# Altium PCB LED Indicator.PcbDoc
Units mil, origin at the board's own origin, x right, y up, seen from the top; angles counter-clockwise.
Board outline 2150 x 1085 mil, 2 copper layers (Top Layer, Bottom Layer); 26 components, 20 nets, 114 pads, 43 vias.
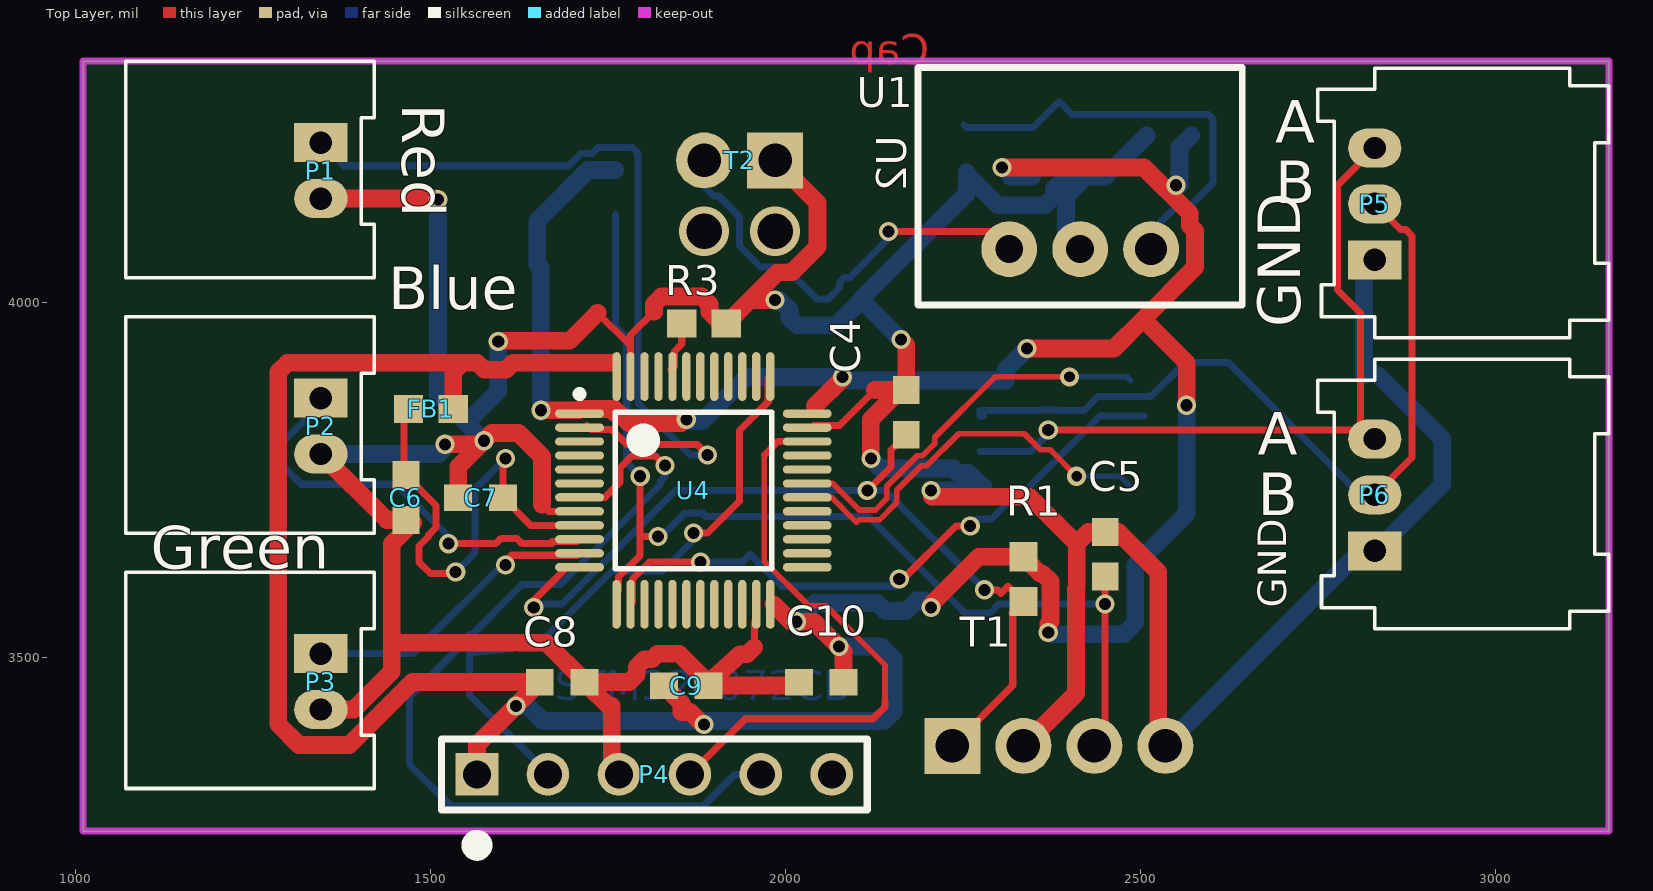
[diagram p0: Top Layer view]
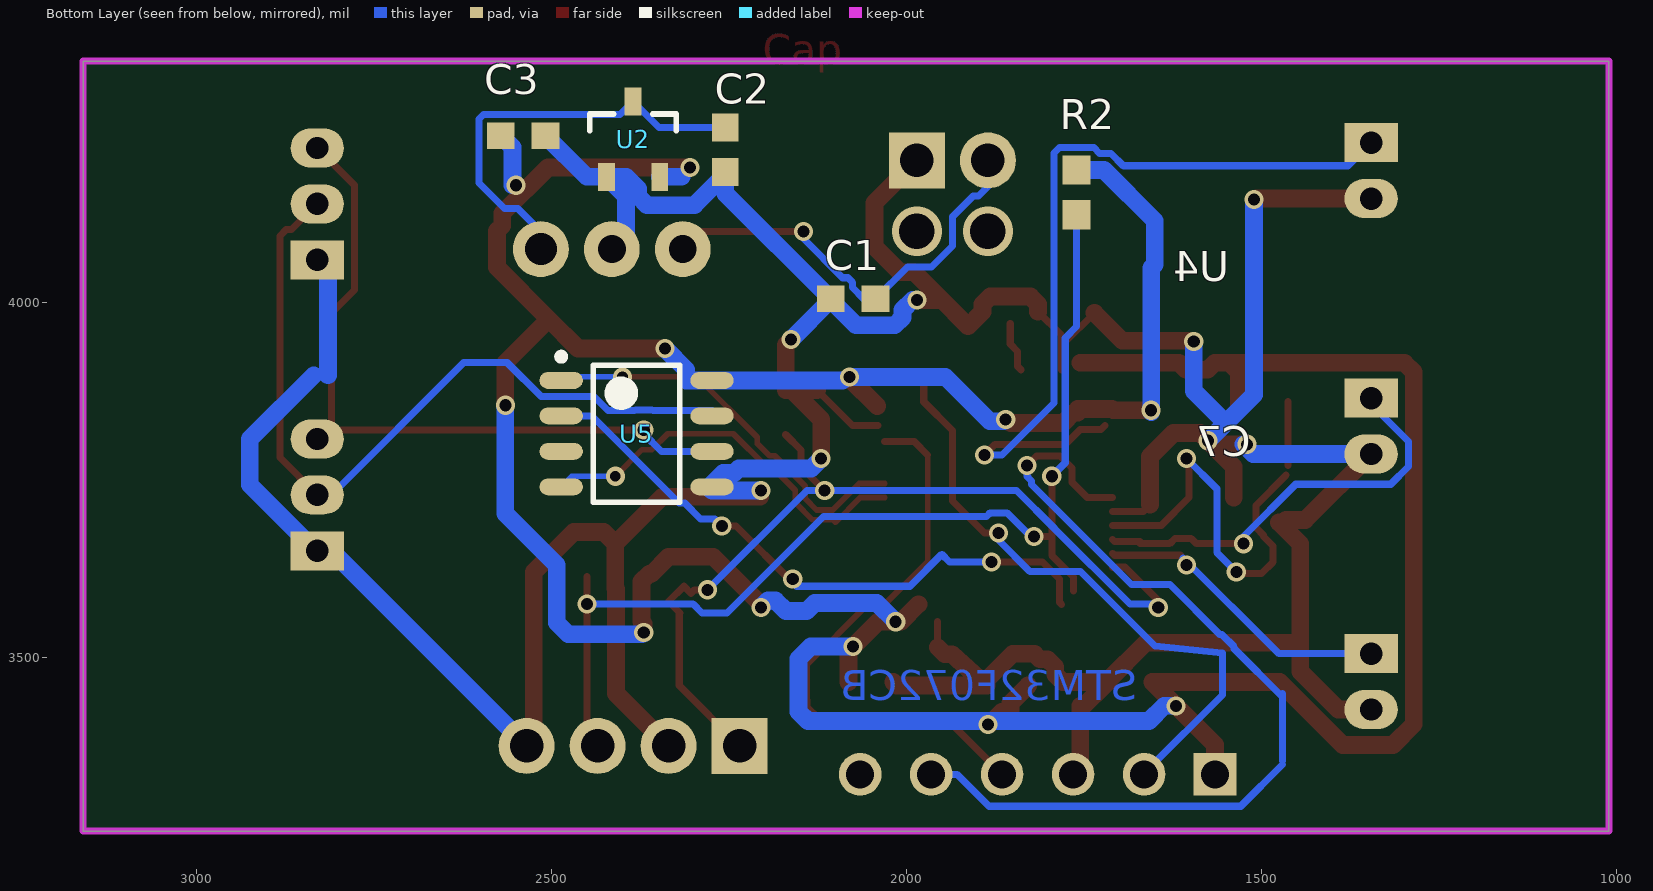
[diagram p1: Bottom Layer view, seen from below]

## Layer stack, top to bottom
Top Solder: solder mask 0.4, Solder Resist, Dk 3.5
Top Layer: signal copper 1.4
Dielectric1: dielectric 12.6, FR-4, Dk 4.8
Bottom Layer: signal copper 1.4
Bottom Solder: solder mask 0.4, Solder Resist, Dk 3.5

## Board outline
1010,3255 1010,4340 3160,4340 3160,3255

## Design rules (kind name [scope] priority, off if disabled: settings)
Clearance [All] p1: gap=10 except(6: Track-Track Track-SMDPad SMDPad-SMDPad)
PolygonConnect [All] p1: connectstyle=Relief reliefconductorwidth=10 reliefentries=4 polygonreliefangle="90 Angle" airgapwidth=10
RoutingVias [All] p1: holewidth=28 width=50 viastyle="Through Hole" minholewidth=28 minwidth=50 maxholewidth=28 maxwidth=50
SolderMaskExpansion [All] p1: expansion=4
Width [All] p1: maxlimit=25 minlimit=8 preferedwidth=10 minimp=50.000000 maximp=50.000000 favimp=50.000000
30 further rules are at their usual default settings.

## Components (designator, comment, footprint, x,y, rotation, side; value= is the part's Value field where it differs from the comment)
C1 "Cap" CAPC0603 2075,4005 r0 bottom
C2 "Cap" CAPC0603 2255,4215 r270 bottom
C3 "Cap" CAPC0603 2540,4235 r180 bottom
C4 "Cap" CAPC0603 2170,3845 r90 top
C5 "Cap" CAPC0603 2450,3645 r90 top
C6 "Cap" CAPC0603 1465,3725 r270 top
C7 "Cap" CAPC0603 1570,3725 r180 top
C8 "Cap" CAPC0603 1685,3465 r0 top
C9 "Cap" CAPC0603 1860,3460 r0 top
C10 "Cap" CAPC0603 2050,3465 r180 top
FB1 "FBead" RES0603 1500,3850 r0 top
P1 "2-pin Horz Sherlock" MOLEX-HDR-1X2-SHERLOCK-HORZ 1345,4225 r90 top
P2 "2-pin Horz Sherlock" MOLEX-HDR-1X2-SHERLOCK-HORZ 1345,3865 r90 top
P3 "2-pin Horz Sherlock" MOLEX-HDR-1X2-SHERLOCK-HORZ 1345,3505 r90 top
P4 "SWD" SWD_STM32 1565,3335 r90 top
P5 "RS485" MOLEX-HDR-1X3-SHERLOCK-RA 2830,4060 r270 top
P6 "RS485_I" MOLEX-HDR-1X3-SHERLOCK-RA 2830,3650 r270 top
R1 "Res" RES0603 2335,3610 r270 top
R2 "Res" RES0603 1760,4155 r270 bottom
R3 "Res" RES0603 1885,3970 r0 top
T1 "1725672" 1725672 2235,3375 r90 top
T2 "1725656" 1725656 1985,4200 r270 top
U1 "R-78C5.0-1.0" R-78C5.0-1.0 2315,4075 r0 top
U2 "MCP1703AT" MCP1703AT-xx02EDB 2385,4230 r90 bottom
U4 "STM32F072CB" STM32F072CB 1870,3735 r0 top
U5 "SP3485" SP3485 2380,3815 r180 bottom

## Footprints (in the part's own frame and the unit in brackets; to place one, negate y for a bottom-side part, rotate by r counter-clockwise, add the part's x,y. Pads: shape width x height; smd on the part's side, far side on the other; paste and mask are expansions set on the pad)
1725656 [mm] "CONN TERM BLOCK 2.54MM 2POS"
  rect 2x2 hole 1.2: 1(0,0)
  round 2 hole 1.2: 2(0,-2.54)
1725672 [mm] "CONN TERM BLOCK 2.54MM 2POS"
  rect 2x2 hole 1.2: 1(0,0)
  round 2 hole 1.2: 2(0,-2.54) 3(0,-5.08) 4(0,-7.62)
CAPC0603 [mm] "Chip Capacitor, 2-Leads, Body 1.60x0.80mm, IPC Medium Density"
  rect 1x0.95 smd: 1(-0.8,0) 2(0.8,0)
  body extent -0.88,-0.48 0.87,0.48, height 0.8
MCP1703AT-xx02EDB [mm] "SOT23, 3-Leads, Body 2.90x2.55mm, Pitch 0.95mm, IPC Medium Density"
  rect 1x0.6 smd: 1(-1.35,0.95) 2(-1.35,-0.95) 3(1.35,0)
  silkscreen extent 0.3,-1.55 0.9,1.55, body extent -0.9,-1.55 0.9,1.55, height 1.45
MOLEX-HDR-1X2-SHERLOCK-HORZ [mm]
  rect 1.397x1.905 hole 0.8: 1(0,0)
  oval 1.397x1.905 hole 0.8: 2(-2,0)
  silkscreen extent -4.83,-1.91 2.92,6.98, body extent -4.83,-1.91 2.87,8.59, height 5.54
MOLEX-HDR-1X3-SHERLOCK-RA [mm]
  rect 1.397x1.905 hole 0.8: 1(0,0)
  oval 1.397x1.905 hole 0.8: 2(-2,0) 3(-4,0)
  silkscreen extent -6.86,-2.03 2.79,8.38, body extent -6.88,-1.99 2.82,8.51, height 5.75
R-78C5.0-1.0 [mm] "CONV DC/DC 1A 5V OUT SIP VERT"
  round 2 hole 1: 1(0,0) 2(2.54,0)
  round 2 hole 1.15: 3(5.08,0)
  silkscreen extent -3.26,-2 8.34,6.5, body extent -3.2,-1.9 8.3,6.5, height 10.8
RES0603 [mm] "Chip Resistor, 2-Leads, Body 1.60x0.80mm, IPC Medium Density"
  rect 1.05x1 smd: 1(-0.8,0) 2(0.8,0)
  body extent -0.88,-0.48 0.87,0.47, height 0.8
SP3485 [mm] "SOIC, 8-Leads, Body 4.90x3.90mm, Pitch 1.27mm, IPC Medium Density"
  oval 1.55x0.6 smd: 1(-2.7,1.905) 2(-2.7,0.635) 3(-2.7,-0.635) 4(-2.7,-1.905) 5(2.7,-1.905) 6(2.7,-0.635) 7(2.7,0.635) 8(2.7,1.905)
  silkscreen extent -2.83,-2.45 1.55,2.88, body extent -1.95,-2.45 1.95,2.45, height 1.75
STM32F072CB [mm] "TSQFP, 48-Leads, Body 7.00x7.00mm, Pitch 0.50mm, IPC Medium Density"
  oval 1.75x0.3 smd: 1(-4.075,2.75) 2(-4.075,2.25) 3(-4.075,1.75) 4(-4.075,1.25) 5(-4.075,0.75) 6(-4.075,0.25) 7(-4.075,-0.25) 8(-4.075,-0.75) 9(-4.075,-1.25) 10(-4.075,-1.75) 11(-4.075,-2.25) 12(-4.075,-2.75) 25(4.075,-2.75) 26(4.075,-2.25) 27(4.075,-1.75) 28(4.075,-1.25) 29(4.075,-0.75) 30(4.075,-0.25) 31(4.075,0.25) 32(4.075,0.75) 33(4.075,1.25) 34(4.075,1.75) 35(4.075,2.25) 36(4.075,2.75)
  oval 0.3x1.75 smd: 13(-2.75,-4.075) 14(-2.25,-4.075) 15(-1.75,-4.075) 16(-1.25,-4.075) 17(-0.75,-4.075) 18(-0.25,-4.075) 19(0.25,-4.075) 20(0.75,-4.075) 21(1.25,-4.075) 22(1.75,-4.075) 23(2.25,-4.075) 24(2.75,-4.075) 37(2.75,4.075) 38(2.25,4.075) 39(1.75,4.075) 40(1.25,4.075) 41(0.75,4.075) 42(0.25,4.075) 43(-0.25,4.075) 44(-0.75,4.075) 45(-1.25,4.075) 46(-1.75,4.075) 47(-2.25,4.075) 48(-2.75,4.075)
  silkscreen extent -4.2,-2.8 2.8,3.57, body extent -3.5,-3.5 3.5,3.5, height 1.6
SWD_STM32 [mil] "SWD connector matching the pinout on STM Discovery Boards"
  rect 60x60 hole 39.37: 1(0,0)
  round 60 hole 39.37: 2(0,-100) 3(0,-200) 4(0,-300) 5(0,-400) 6(0,-500)
  silkscreen extent -110,-550 50,50

## Part data
FB1: "Ferrite Bead"
P1 P2 P3: library part MOLEX-HDR-1x2-SHERLOCK_RA, "Header, Molex, 2mm Pitch Sherlock Header, Single Row, Horizontal, 2 Circuits, Length 3.3mm,  0353630260"
P4: library part SWD_STM32, "SWD connector matching the pinout on STM Discovery Boards"
P5 P6: library part MOLEX-HDR-1x3-SHERLOCK_RA, "Header, Molex, 2mm Pitch Sherlock Header, Single Row, Right Angle 3 Circuits, Length 3.3mm"
T1: "CONN TERM BLOCK 2.54MM 4POS"
T2: "CONN TERM BLOCK 2.54MM 2POS"
U1: "CONV DC/DC 1A 5V OUT SIP VERT"
U2: "250 mA, 16V, Low Quiescent Current LDO Regulator"
U4: "MCU 32BIT 128KB FLASH 48LQFP"
U5: "IC TXRX RS485 HALF DUPLEX 8NSOIC"

## Via types
v1: diameter 27, hole 17, Top Layer to Bottom Layer, tented both sides, 37 vias
v2: diameter 70, hole 50, Top Layer to Bottom Layer, tented both sides, 2 vias
v3: diameter 27, hole 17, Top Layer to Bottom Layer, 2 vias
v4: diameter 27, hole 15, Top Layer to Bottom Layer, tented both sides, 2 vias

## Nets (pads, with @x,y where several pads share a name; then routed paths per layer and width w, separated by ;. In a path a pad name is that pad's centre, name@x,y a point inside that pad or via, vN(x,y) a via of type N, cw(c..) or ccw(c..) an arc to the next point about the centre after c; other vN are vias at no path point)
3V3: C3.1 C8.1 C9.1 C10.1 FB1.2 P4.1 R1.1 R2.1 U2.2 U4.1 U4.24 U4.36 U4.48 U5.8 | length 5665.7
  Top Layer w25: FB1.2 1531.5,3901.5 1545,3915 ; P4.1@1565,3345 1565,3376.5 v1(1620,3431.5) C8.1 1473.84,3465 1385.1,3376.26 1314.29,3376.26 1285,3405.55 1285,3901.82 1298.18,3915 1545,3915 ; v1(1655,3847.99) U4.1@1708.39,3847.99 ; 1710.27,3849.86 1758.29,3849.86 1758.29,3844.3 1764.75,3844.3 1779.05,3830 v1@1852.99,3830 ; 1755,3915 1615.91,3915 1605.91,3905 1575.5,3905 1565.5,3915 1545,3915 ; C9.1 1853.31,3435.19 1853.31,3422.8 1865.7,3422.8 1883.5,3405 v1(1885,3405) ; U4.24@1982.99,3574.57 2007.56,3550 v1(2015,3550) 2040,3550 2081.5,3508.5 C10.1 ; 2041.08,3853.92 2080,3892.83 v1(2080,3895) ; v1(2205,3570) 2205,3574.5 2272,3641.5 R1.1 2358.82,3617.67 2362.35,3617.67 2373.19,3606.84 2373.19,3550.17 2370,3546.99 v1(2370,3535) ; v3(2305,4190) 2505,4190 2569.37,4125.63 2569.37,4108.13 2576.87,4100.63 2576.87,4049.37 2503.75,3976.25 ; v1(2340,3935) 2462.5,3935 2503.75,3976.25 ; v1(2565,3855) 2565,3915 2503.75,3976.25
  Bottom Layer w25: v1(1620,3431.5) 1636.68,3431.5 1658.18,3410 1878.5,3410 2138.67,3410 2151.86,3423.18 2151.86,3497.81 2134.66,3515 v1(2075,3515) ; v1@1655,3845 v1(1655,3847.99) 1655,4048.31 1650,4053.31 1650,4115 1721.5,4186.5 R2.1 ; v1(1860,3835) 1862.5,3832.5 1882.5,3832.5 1945,3895 v1(2080,3895) ; v1(2015,3550) 2041.5,3576.5 2129,3576.5 2140.5,3565 2169.5,3565 2184.5,3580 2195,3580 v1(2205,3570) ; v1@2090,3890 U5.8 2310,3890 2310,3905 v1(2340,3935) ; 2316.85,4176.85 U2.2 ; v1(2370,3535) 2372.5,3532.5 2476.39,3532.5 2492.5,3548.61 2492.5,3630 2565,3702.5 v1(2565,3855) ; v3@2555,4165 2555,4218.5 C3.1
  other v3: 2550,4165
A: P5.3 P6.3 U5.6 | length 1005.7
  Top Layer w10: v1(2370,3820) P6.3@2797.48,3820 ; P6.3@2810,3807.48 2810,3985 2777.5,4017.5 2777.5,4164.98 P5.3 P5.3@2830,4208.84 ; P6.3@2817.48,3820 P6.3
  Bottom Layer w10: U5.6 2345,3790 v1@2370,3815
B: P5.2 P6.2 U5.7 | length 1112.6
  Top Layer w10: P6.2 2882.5,3781.24 2882.5,4093.71 2873.71,4102.5 2866.24,4102.5 P5.2
  Bottom Layer w10: U5.7@2278.7,3840 U5.7 2273.7,3847.5 2357.2,3847.5 2358.2,3848.5 2381.8,3848.5 2382.8,3847.5 2420.4,3847.5 2440.09,3867.19 2514.45,3867.19 2562.26,3915 2623.74,3915 P6.2@2810,3728.74
CTRL_BLUE: P2.1 U4.10 | length 590.6
  Top Layer w10: v1(1525,3660) 1591.11,3660 1598.61,3667.5 1621.39,3667.5 1628.89,3660 1670.7,3660 1670.7,3663.32 1706.79,3663.32 U4.10
  Bottom Layer w10: P2.1@1346.82,3858.18 1292.5,3803.86 1292.5,3768.66 1317.4,3743.76 1451.24,3743.76 1525,3670 v1(1525,3660)
CTRL_GREEN: P3.1 U4.11 | length 423.1
  Top Layer w10: v1@1610,3640 1613.64,3643.64 1706.79,3643.64 U4.11
  Bottom Layer w10: P3.1 1475,3505 v1@1610,3640
  other v1: 1605,3630
CTRL_RED: P1.1 U4.2 | length 1142.1
  Top Layer w10: U4.2@1720,3826.36 1725.56,3820.8 1755.02,3820.8 1775.82,3800 1875,3800 v1(1890,3785)
  Bottom Layer w10: P1.1 1377.5,4192.5 1694.27,4192.5 1711.76,4210 1727.59,4210 1735.76,4218.17 1784.24,4218.17 1792,4210.41 1792,3858 1865,3785 v1(1890,3785)
DE/RE: U4.14 U5.2 | length 882.9
  Top Layer w10: U4.14 1784.2,3577.35 1784.2,3610.11 1808.08,3634 v1(1880,3634) ; v1@2160,3605 2240,3685 v1(2260,3685)
  Bottom Layer w10: v1(1880,3634) 1939,3634 1950,3645 1995,3600 v1@2155,3600 ; v1(2260,3685) 2270,3695 2290,3695 2312.19,3717.19 2320.21,3717.19 2443.02,3840 U5.2@2505,3840
  other v1: 2160,3610
ENABLE: U4.20
GND: C1.2 C2.2 C3.2 C4.2 C5.2 C6.2 C7.2 C8.2 C9.2 C10.2 P1.2 P2.2 P3.2 P4.3 P5.1 P6.1 R3.2 T1.2 T1.4 T2.1 U1.2 U2.1 U4.8 U4.23 U4.35 U4.47 U5.5 | length 6770.4
  Top Layer w10: 1656.62,3715.05 1666.19,3705.47 U4.8 ; 1735,3985.22 1778.32,3941.9 ; U4.47@1781.42,3905 1781.42,3953.82 1814.33,3986.74 ; 1955.8,3514.02 U4.23@1955.8,3550 ; U4.35@2040,3826.36 2075.88,3826.36 2126.02,3876.5
  Top Layer w25: P3.2 1391.26,3426.26 1445,3480 1445,3660 C6.2@1475,3690 ; P2.2 1437.76,3693.5 C6.2 ; P1.2 v1@1506.26,4146.26 ; 1445,3520.3 1662.75,3520.3 1716.5,3466.56 C8.2 ; v1@1525,3800 v1@1570,3800 ; C7.2 1538.5,3768.5 v1@1570,3800 ; v1@1595,3944.5 v1(1595,3945) 1596,3946 1695.78,3946 1735,3985.22 ; 1656.62,3715.05 1656.62,3782.88 1623.5,3816 1586,3816 v1(1575,3805) v1@1570,3800 ; P4.3@1755,3335 1755,3431.5 ; 1755,3426.5 C8.2 ; P4.3@1760,3340 P4.3 ; 1814.33,3986.74 1814.33,3997.35 1825.17,4008.19 1881.84,4008.19 1892.67,3997.35 1892.67,3986.74 R3.2@1912.96,3966.46 ; C9.2 2013.5,3460 C10.2 ; R3.2 1950,4003.5 ; 1955.8,3514.02 1945.9,3504.12 1935.61,3504.12 C9.2@1890.98,3464.02 ; v1(1985,4003.5) 1950,4003.5 ; T2.1 2045,4140 2045,4078.68 2008.82,4042.5 1989,4042.5 1950,4003.5 ; v1(2120,3780) 2120,3835 2161.5,3876.5 C4.2 ; 2126.02,3876.5 C4.2 ; v1(2162.5,3947.5) 2170,3940 C4.2 ; v1@2206,3726 2344,3726 2410,3660 ; T1.2 2409,3449 2409,3596.13 2410,3597.13 2410,3660 ; T1.4@2525,3380 2525,3620 2468.5,3676.5 C5.2 2426.5,3676.5 2410,3660 ; C8.2 1779.56,3465 1790.32,3475.76 1790.32,3486.36 1801.16,3497.2 1811.76,3497.2 1819.56,3505 1850,3505 C9.2@1890.98,3464.02 ; C9.2@1890.98,3464.02 1889.26,3462.49 1886.5,3460 1889.85,3462.35 1891.5,3463.5 C9.2@1890.98,3464.02
  Bottom Layer w25: P2.2 1511.26,3786.26 v1@1525,3800 ; v1(1510,4145) 1510,3870 1550,3830 ; v1(1575,3805) 1550,3830 ; v1(1595,3945) 1595,3875 1550,3830 ; v1(1985,4003.5) 1991.06,4003.5 2005.32,3989.24 2005.32,3978.64 2016.16,3967.8 2070.85,3967.8 2106.5,4003.44 C1.2 ; v1(2120,3780) 2134,3766 2236.13,3766 2242.44,3759.69 2258.05,3759.69 2277.74,3740 2278.7,3740 2273.7,3735 v1(2205,3735) ; v1(2162.5,3947.5) 2106.5,4003.5 C1.2 ; U1.2@2395,4075 2395,4149.45 U2.1 ; C3.2 2450.35,4176.85 U2.1 ; T1.4 T1.4@2550,3375 ; T1.4@2540,3380 P6.1@2810,3650 ; 2815,3897.48 P5.1@2815,4050 ; P6.1 2831.97,3650 2925,3743.03 2925,3807.48 2835,3897.48 ; C1.2 2255,4153.5 C2.2 2255,4180.5 2298.63,4136.87 2365.28,4136.87 2377.91,4149.5 2377.91,4160.11 2394.65,4176.85 U2.1
  other v1: 1520,3800
HARDKILL: C4.1 R1.2 T1.1 U4.12 | length 1271.4
  Top Layer w10: v1(1645,3570) 1645,3580 1691.73,3626.73 U4.12 ; v1@2110,3735 2115.3,3735 2148.5,3768.2 2148.5,3791.9 2148.4,3791.9 C4.1 ; T1.1 2320,3460 2320,3562.54 2319.03,3562.54 R1.2 2313.5,3600 2303.5,3590 2298.5,3595 v1(2280,3595)
  Bottom Layer w10: v1@1650,3575 1685,3575 1791.5,3681.5 1791.5,3681.8 1844.69,3735 2110,3735 2140,3735 v1(2280,3595)
  other v1: 2115,3735
NetC2_1: C2.1 U1.3 U2.3 | length 611.3
  Bottom Layer w10: C2.1@2251.5,4250 C2.1 2348.35,4246.5 U2.3 2403.45,4264.7 2595.74,4264.7 2602.18,4258.26 2602.18,4168.29 2566.39,4132.5 2547.5,4132.5 U1.3@2495,4080
NetC6_1: C6.1 C7.1 FB1.1 U4.9 | length 674.7
  Top Layer w10: C6.1@1462.01,3770 FB1.1@1462.01,3860 ; C6.1 1507.5,3714 1507.5,3682.8 1496.5,3671.8 1496.5,3669.89 1483.31,3656.69 1483.31,3633.91 1499.42,3617.8 1522.2,3617.8 1530.25,3625.86 1535,3621.11 v1(1535,3620) ; v1(1605,3780) 1601.5,3776.5 C7.1 1640.71,3685.79 U4.9
  Bottom Layer w10: v1(1535,3620) 1562.5,3647.5 1562.5,3737.5 v1(1605,3780)
NetR3_1: R3.1 U4.44 | length 71.3
  Top Layer w10: U4.44@1838.25,3905 1843.25,3910 1843.25,3930.98 1853.5,3941.23 R3.1
RAILIN: C1.1 T2.2 U1.1 | length 606.3
  Top Layer w10: v1(2145,4100) 2290,4100 U1.1
  Bottom Layer w10: T2.2 1885,4163.5 1898.5,4150 1905.71,4150 1935,4120.71 1935,4079.29 1964.29,4050 1998.5,4050 C1.1 2060,4005 2075.81,4020.81 2075.81,4028.26 2082.25,4034.7 2089.7,4034.7 v1@2145,4090
RSTN: P4.5 U4.7 | length 1303.8
  Top Layer w10: U4.7 1745.16,3725.16 1766.5,3746.5 1766.5,3766.8 1783.19,3783.5 1816.5,3783.5 v1(1830,3770)
  Bottom Layer w10: 1470,3348.79 1528.79,3290 1883.64,3290 1928.64,3335 P4.5 ; 1470,3353.79 1470,3448.89 ; 1470,3443.89 1538,3511.89 1538,3514.65 1555.55,3532.19 1558.3,3532.19 1628.61,3602.5 1682.81,3602.5 1823.5,3743.2 1823.5,3748.5 1830,3755 v1(1830,3770)
SOFTKILL: C5.1 R2.2 T1.3 U4.13 | length 1534.1
  Top Layer w10: U4.13@1764.51,3593.73 1764.51,3613.06 1795,3643.54 1795,3670 ; v1(1795,3755) 1795,3670 ; v1(1820,3670) 1795,3670 ; T1.3 2450,3390 v1(2450,3575) C5.1
  Bottom Layer w10: R2.2 1760,3965.93 1776,3949.93 1776,3774 v1(1795,3755) ; v1(1820,3670) 1824.69,3670 1858.19,3703.5 1881.81,3703.5 1886.81,3698.5 2116.8,3698.5 2252.8,3562.5 2287.8,3562.5 2300.3,3575 v1(2450,3575)
SWCLK: P4.2 U4.37 | length 941.1
  Top Layer w10: v1(1870,3675) 1890,3675 1935,3720 1935,3819.4 1975.49,3859.89 1975.49,3892.65 U4.37
  Bottom Layer w10: P4.2@1649.5,3350.5 P4.2 P4.2@1665,3360.05 ; P4.2@1660,3320.05 1660,3341.5 1554.5,3447 1554.5,3505.65 1649.5,3515.69 1754.81,3621 1826,3621 1870,3665 v1(1870,3675)
SWDIO: P4.4 U4.34 | length 822
  Top Layer w8: 1970,3785 1970,3635 2032.5,3572.5 2056.39,3572.5 2140,3488.89 2140,3440
  Top Layer w10: P4.4 1943.26,3413.26 2123.26,3413.26 2140,3430 2140,3440 ; 1970,3785 1988.9,3803.9 U4.34
USARTRX: U4.31 U5.1 | length 566.5
  Top Layer w8: U4.31 2066.27,3744.84 2103.61,3707.5 2126.39,3707.5 2142.5,3723.61 2142.5,3740.98 2185.34,3783.82 2192.84,3783.82 2210,3800.98 2210,3810 2295,3895 v4(2400,3895)
  Bottom Layer w8: v4(2400,3895) 2481.3,3895 U5.1
USARTTX: U4.30 U5.4 | length 563.4
  Top Layer w8: U4.30 2064.84,3725.16 2100,3690 2103.5,3693.5 2132.19,3693.5 2156.5,3717.81 2156.5,3735.18 2191.14,3769.82 2198.64,3769.82 2243.82,3815 2336.11,3815 2358.61,3792.5 2372.5,3792.5 v4(2410,3755)
  Bottom Layer w8: v4(2410,3755) 2471.3,3755 U5.4
pads on no net: P4.6 U4.3 U4.4 U4.5 U4.6 U4.15 U4.16 U4.17 U4.18 U4.19 U4.21 U4.22 U4.25 U4.26 U4.27 U4.28 U4.29 U4.32 U4.33 U4.38 U4.39 U4.40 U4.41 U4.42 U4.43 U4.45 U4.46 U5.3
copper on no net:
  other v2: 1885,4100 1985,4100

## Keep-outs
Keep-Out Layer:
  the board outline again, w10

## Silkscreen, mask and mechanical layers (free items; w line width, h text height)
Top Overlay:
  text "Red" at 1460,4280 h60 r270
  text "A" at 2690,4225 h60
  text "B" at 2690,4140 h60
  text "Blue" at 1440,3990 h60
  text "GND" at 2725,3965 h60 r90
  text "A" at 2665,3785 h60
  text "B" at 2665,3700 h60
  text "Green" at 1105,3625 h60
  text "GND" at 2705,3570 h40 r90